# Altium PCB PCB2.PcbDoc
Units mm, origin at the board's own origin, x right, y up, seen from the top; angles counter-clockwise.
Board outline 27 x 48 mm, 2 copper layers (Top Layer 1, Bottom Layer 1), stack 0.532 mm thick; 25 components, 19 nets, 96 pads, 17 vias.
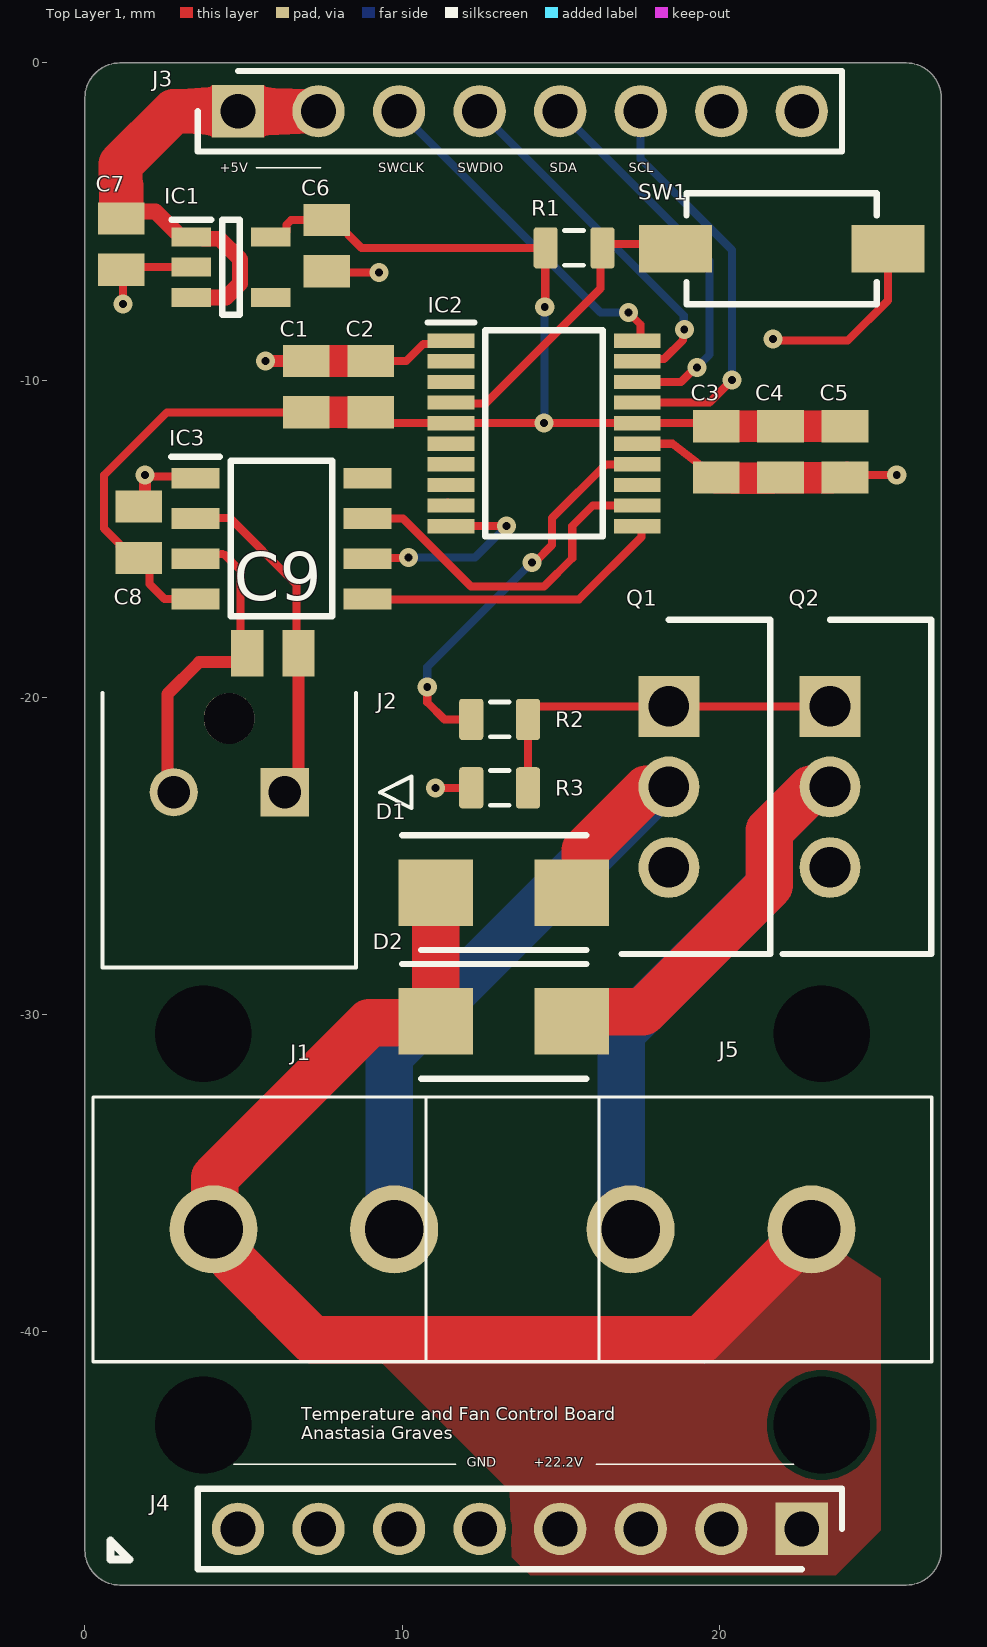
[diagram p0: Top Layer 1 view]
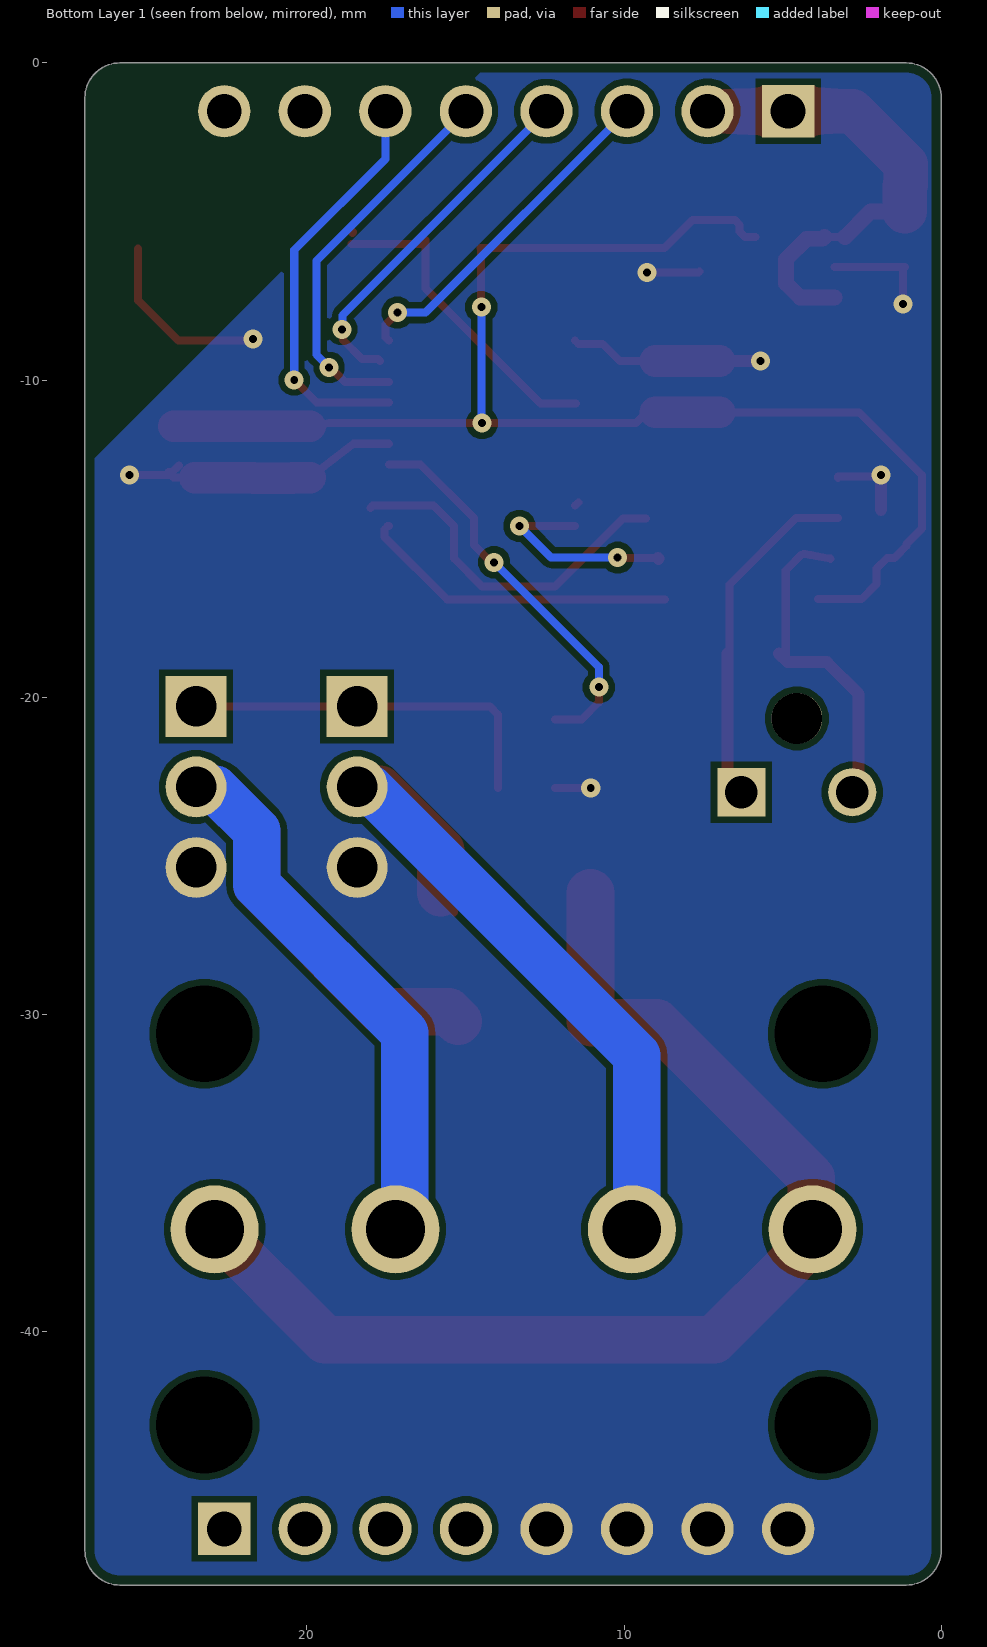
[diagram p1: Bottom Layer 1 view, seen from below]
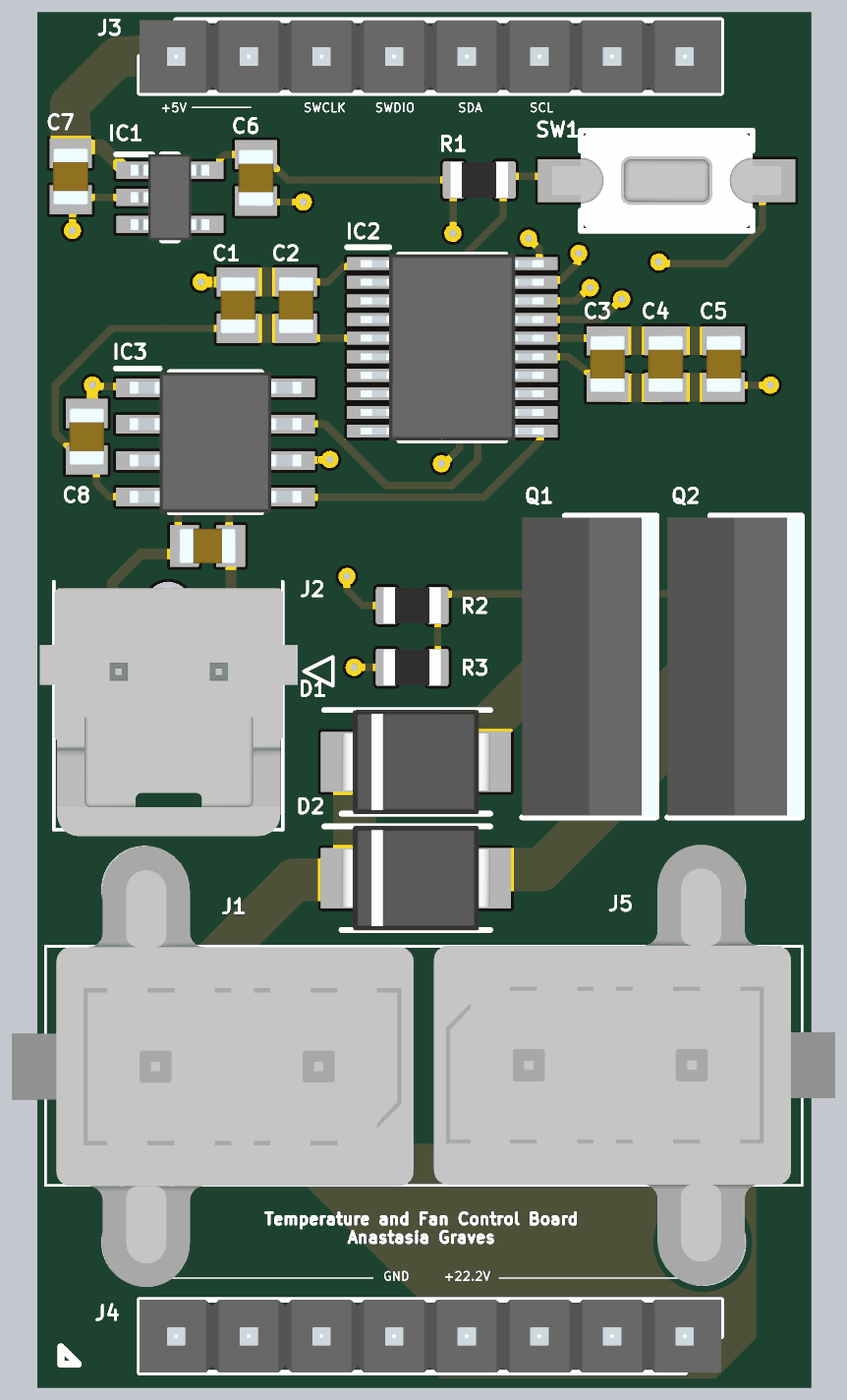
[diagram p2: 3D render of the assembled board from above, using the file's embedded part models]

## Layer stack, top to bottom
Top Solder: solder mask 0.0102, Solder Resist, Dk 3.5
Top Layer 1: signal copper 0.035
Dielectric 2: prepreg 0.0711, PP-006, Dk 4.1
Dielectric 1: dielectric 0.32, FR-4, Dk 4.8
Dielectric 3: prepreg 0.0711, PP-006, Dk 4.1
Bottom Layer 1: signal copper 0.035
Bottom Solder: solder mask 0.0102, Solder Resist, Dk 3.5

## Board outline
1.1,-48 cw(c1.1,-46.9) 0,-46.9 0,-1.1 cw(c1.1,-1.1) 1.1,0 25.9,0 cw(c25.9,-1.1) 27,-1.1 27,-46.9 cw(c25.9,-46.9) 25.9,-48

## Design rules (kind name [scope] priority, off if disabled: settings)
BoardOutlineClearance [All] p1: gap=0.3 ignorepadtopadclearanceinfootprint=FALSE except(0.4: Arc-SplitBarrior Arc-SplitContinuation Track-SplitBarrior Track-SplitContinuation SMDPad-SplitBarrior SMDPad-SplitContinuation THPad-SplitBarrior THPad-SplitContinuation Via-SplitBarrior Via-SplitContinuation Fill-SplitBarrior Fill-SplitContinuation Poly-SplitBarrior Poly-SplitContinuation Region-SplitBarrior Region-SplitContinuation Text-SplitBarrior Text-SplitContinuation)
Clearance "Clearance Different Nets" [All] p1: gap=0.2 ignorepadtopadclearanceinfootprint=FALSE except(0.089: Arc-Arc Arc-Track Arc-SMDPad Track-Track Track-SMDPad; 0.127: SMDPad-SMDPad SMDPad-Via THPad-Via Via-Via; 0.254: Arc-Via Arc-Text Track-Via Track-Text SMDPad-Text THPad-Text Via-Text Fill-Text Poly-Text Region-Text Text-Text; 0.5: THPad-THPad Via-Hole)
Clearance "Clearance Same Nets" [All] p2: gap=0.2 ignorepadtopadclearanceinfootprint=FALSE except(0.089: Arc-Arc Arc-Track Arc-SMDPad Track-Track Track-SMDPad SMDPad-SMDPad; 0.127: SMDPad-Via THPad-Via; 0.254: Arc-Via Arc-Text Track-Via Track-Text SMDPad-Text THPad-Text Via-Via Via-Text Fill-Text Poly-Text Region-Text Text-Text)
Clearance "Clearance Bottom Layer" [OnLayer('Bottom Layer')] p3: gap=0.203 ignorepadtopadclearanceinfootprint=TRUE except(0.254: Arc-Text Track-Text SMDPad-Text THPad-Text Via-Text Fill-Text Poly-Text Region-Text Text-Text)
Clearance "Clearance Top Layer" [OnLayer('Top Layer')] p4: gap=0.203 ignorepadtopadclearanceinfootprint=TRUE except(0.254: Arc-Text Track-Text SMDPad-Text THPad-Text Via-Text Fill-Text Poly-Text Region-Text Text-Text)
HoleSize [All] p1: absolutevalues=TRUE maxlimit=6.3 minlimit=0.2 maxpercent=80.000 minpercent=20.000
MinimumAnnularRing [All] p1: minimumring=0.13
MinimumSolderMaskSliver [All] p1: minsoldermaskwidth=0.1
PolygonConnect PolygonConnect_1 [All] p1: connectstyle=Direct reliefconductorwidth=0.508 reliefentries=4 polygonreliefangle="90 Angle" airgapwidth=0.254
RoutingCorners [All] p1: cornerstyle=Round minsetback=2.54 maxsetback=2.54
RoutingVias [All] p1: holewidth=0.5 width=1 viastyle="Through Hole" minholewidth=0.2 minwidth=0.35 maxholewidth=1 maxwidth=2
SilkToSilkClearance [All] p1: silktosilkclearance=0.1
SilkToSolderMaskClearance [IsPad] p1: minsilkscreentomaskgap=0.1 clearancetoexposedcopper=TRUE
SolderMaskExpansion [All] p1: expansion=0.102 istentingtop=FALSE
SupplyNets "Schematic Supply Nets_8" [InNet('+22.2')] p1: voltage=0.000
SupplyNets "Schematic Supply Nets_7" [InNet('VDD')] p2: voltage=0.000
SupplyNets "Schematic Supply Nets_6" [InNet('VSS')] p3: voltage=0.000
SupplyNets "Schematic Supply Nets_3" [InNet('+5')] p4: voltage=0.000
Width [All] p1: maxlimit=2.54 minlimit=0.089 preferedwidth=0.381
25 further rules are at their usual default settings.

## Components (designator, comment, footprint, x,y, rotation, side; value= is the part's Value field where it differs from the comment)
C1 "1uF" CAPC2012X94N#1 6.985,-10.208 r270 top
C2 "10nF" CAPC2012X94N#1 9.017,-10.208 r270 top
C3 "4.7uf" CAPC2012X94N#1 19.904,-12.263 r90 top
C4 "100nF" CAPC2012X94N#1 21.936,-12.263 r90 top
C5 "100nF" CAPC2012X94N#1 23.968,-12.263 r90 top
C6 "1uF" CAPC2012X94N#1 7.62,-5.763 r90 top
C7 "1uF" CAPC2012X94N#1 1.143,-5.715 r90 top
C8 "0.1uF" CAPC2012X94N#2 1.7,-14.8 r270 top
C9 "0.01uF" CAPC2012X94N#1 5.925,-18.62 r0 top
D1 "SD560BTR" DIOM5236X260N 13.208,-26.162 r0 top
D2 "SD560BTR" DIOM5236X260N 13.208,-30.226 r0 top
IC1 "NCP164CSN330T1G" SOT95P275X110-5N 4.607,-6.442 r0 top
IC2 "STM32F030F4P6TR" SOP65P640X120-20N 14.478,-11.684 r0 top
IC3 "MAX31855KASA+" SOIC127P600X175-8N 6.2,-15 r0 top
J1 "172065-0002" 1720650002 9.754,-36.783 r90 top
J2 "172286-1302" 172286-YY02 6.3,-23 r180 top
J3 "61300811121" HDRV8W64P0X254_1X8_2032X254X854P 4.826,-1.524 r0 top
J4 "61300811121" HDRV8W64P0X254_1X8_2032X254X854P 22.606,-46.228 r180 top
J5 "172065-0002" 1720650002 17.209,-36.783 r270 top
Q1 "IRLZ44NPBF" TO254P469X1042X1967-3P 18.415,-20.29 r270 top
Q2 "IRLZ44NPBF" TO254P469X1042X1967-3P 23.495,-20.29 r270 top
R1 "Resistor 4R7  +/-5 % 0805 125 mW" RESC0805(2012)_L 15.42,-5.833 r180 top value=40k
R2 "Resistor 4R7  +/-5 % 0805 125 mW" RESC0805(2012)_L 13.081,-20.701 r0 top value=220
R3 "Resistor 4R7  +/-5 % 0805 125 mW" RESC0805(2012)_L 13.081,-22.86 r0 top value=40k
SW1 "434111050826" 434111050826 21.971,-5.859 r0 top

## Footprints (in the part's own frame and the unit in brackets; to place one, negate y for a bottom-side part, rotate by r counter-clockwise, add the part's x,y. Pads: shape width x height; smd on the part's side, far side on the other; paste and mask are expansions set on the pad)
172286-YY02 [mm]
  rect 1.52x1.52 hole 1.02: 1(0,0)
  round 1.52 hole 1.02: 2(3.5,0)
  round 1.6 hole 1.6 unplated: 3(1.75,-2.33)
  silkscreen extent -4,-3.13 5.75,5.53, body extent -2.77,-2.91 6.23,5.75, height 13.85
1720650002 [mm]
  round 2.775 hole 1.85: 1(0,0) 2(0,5.7)
  round 1.525 hole 3.05 unplated: 3(-6.17,6.025) 4(6.17,6.025)
  silkscreen extent -4.18,-6.46 4.18,9.5, body extent -7.73,-3.37 7.67,10.66, height 14.73
434111050826 [mm] "SMD Tact Switch, body 6x3.5mm"
  rect 2.3x1.5 smd: 1(-3.35,0) 2(3.35,0)
  silkscreen extent -3,-1.75 3,1.75, body extent -4,-1.75 4,1.75, height 5
CAPC2012X94N#1 [mm]
  rect 1.02x1.47 smd: 1(-0.81,0) 2(0.81,0)
  body extent -1,-0.63 1,0.63, height 0.94
CAPC2012X94N#2 [mm]
  rect 1.02x1.47 smd: 1(-0.81,0) (0.81,0)
  body extent -1,-0.63 1,0.63, height 0.94
DIOM5236X260N [mm]
  rect 2.35x2.1 smd: 1(-2.15,0) 2(2.15,0)
  silkscreen extent -3.2,-1.81 2.6,1.81, body extent -2.6,-1.83 2.6,1.83, height 2.4
HDRV8W64P0X254_1X8_2032X254X854P [mm]
  rect 1.65x1.65 hole 1.1: 1(0,0)
  round 1.65 hole 1.1: 2(2.54,0) 3(5.08,0) 4(7.62,0) 5(10.16,0) 6(12.7,0) 7(15.24,0) 8(17.78,0)
  silkscreen extent -1.27,-1.27 19.05,1.27, body extent -1.27,-1.27 19.05,1.27, height 8.54
RESC0805(2012)_L [mm] "Chip Resistor, Body 2.0x1.3mm, IPC High Density"
  rrect25% 0.76x1.3 smd: 1(-0.9,0) 2(0.89,0)
  silkscreen extent -0.3,-0.55 0.3,0.55, body extent -1,-0.62 1,0.63, height 0.6
SOIC127P600X175-8N [mm]
  rect 1.525x0.65 smd: 1(-2.712,1.905) 2(-2.712,0.635) 3(-2.712,-0.635) 4(-2.712,-1.905) 5(2.712,-1.905) 6(2.712,-0.635) 7(2.712,0.635) 8(2.712,1.905)
  silkscreen extent -3.47,-2.45 1.6,2.58, body extent -3,-2.45 3,2.45, height 1.75
SOP65P640X120-20N [mm]
  rect 1.475x0.45 smd: 1(-2.938,2.925) 2(-2.938,2.275) 3(-2.938,1.625) 4(-2.938,0.975) 5(-2.938,0.325) 6(-2.938,-0.325) 7(-2.938,-0.975) 8(-2.938,-1.625) 9(-2.938,-2.275) 10(-2.938,-2.925) 11(2.938,-2.925) 12(2.938,-2.275) 13(2.938,-1.625) 14(2.938,-0.975) 15(2.938,-0.325) 16(2.938,0.325) 17(2.938,0.975) 18(2.938,1.625) 19(2.938,2.275) 20(2.938,2.925)
  silkscreen extent -3.67,-3.25 1.85,3.5, body extent -3.2,-3.25 3.2,3.25, height 1.2
SOT95P275X110-5N [mm]
  rect 1.25x0.6 smd: 1(-1.25,0.95) 2(-1.25,0) 3(-1.25,-0.95) 4(1.25,-0.95) 5(1.25,0.95)
  silkscreen extent -1.88,-1.5 0.28,1.5, body extent -1.38,-1.5 1.38,1.5, height 1.1
TO254P469X1042X1967-3P [mm]
  rect 1.92x1.92 hole 1.28: 1(0,0)
  round 1.92 hole 1.28: 2(2.54,0) 3(5.08,0)
  silkscreen extent -2.73,-1.5 7.81,3.19, body extent -2.67,-1.5 7.75,3.19, height 18.84

## Part data
C1 C2 C3 C4 C5 C6 C7 C8 C9: library part 08055C104K4T2A, "Capacitor", Manufacturer_Name="Kyocera AVX", Mouser Part Number=581-08055C104K4, Arrow Part Number=08055C104K4T2A, Arrow Price/Stock=https://www.arrow.com/en/products/08055c104k4t2a/avx, Datasheet Link=https://componentsearchengine.com/Datasheets/2/08055C104K4T2A.pdf, Height=0.94mm, Manufacturer_Part_Number=08055C104K4T2A, Mouser Price/Stock=https://www.mouser.co.uk/ProductDetail/KYOCERA-AVX/08055C104K4T2A?qs=xMTsDkQFXIwOG0s%252Bx1urSg%3D%3D
D1 D2: "Diode", Manufacturer_Name="SMC Diode Solutions", Datasheet Link=http://www.smc-diodes.com/propdf/SD560B%20N1412%20REV.D.pdf, Height=2.6mm, Manufacturer_Part_Number=SD560BTR
IC1: "Integrated Circuit", Manufacturer_Name=onsemi, Mouser Part Number=863-NCP164CSN330T1G, Arrow Part Number=NCP164CSN330T1G, Arrow Price/Stock=https://www.arrow.com/en/products/ncp164csn330t1g/on-semiconductor?utm_currency=USD&region=nac, Datasheet Link=https://componentsearchengine.com/Datasheets/2/NCP164CSN330T1G.pdf, Height=1.1mm, Manufacturer_Part_Number=NCP164CSN330T1G, Mouser Price/Stock=https://www.mouser.co.uk/ProductDetail/onsemi/NCP164CSN330T1G?qs=xZ%2FP%252Ba9zWqbi%2FAyy5UtoRw%3D%3D
IC2: "Integrated Circuit", Manufacturer_Name=STMicroelectronics, Mouser Part Number=511-STM32F030F4P6TR, Arrow Part Number=STM32F030F4P6TR, Arrow Price/Stock=https://www.arrow.com/en/products/stm32f030f4p6tr/stmicroelectronics?utm_currency=USD&region=nac, Datasheet Link=https://www.st.com/resource/en/datasheet/stm32f030rc.pdf, Height=1.2mm, Manufacturer_Part_Number=STM32F030F4P6TR, Mouser Price/Stock=https://www.mouser.co.uk/ProductDetail/STMicroelectronics/STM32F030F4P6TR?qs=MavH1QghrkE4yfyLOfvVsw%3D%3D
IC3: "Integrated Circuit", Manufacturer_Name="Analog Devices", Mouser Part Number=700-MAX31855KASA+, Arrow Part Number=MAX31855KASA+, Arrow Price/Stock=https://www.arrow.com/en/products/max31855kasa/analog-devices?utm_currency=USD&region=nac, Datasheet Link=https://datasheets.maximintegrated.com/en/ds/MAX31855.pdf, Height=1.75mm, Manufacturer_Part_Number=MAX31855KASA+, Mouser Price/Stock=https://www.mouser.co.uk/ProductDetail/Analog-Devices-Maxim-Integrated/MAX31855KASA%2b?qs=ffX8NcjNb2QF5YDuL5Qj5g%3D%3D
J1 J5: "Connector", Manufacturer_Name=Molex, Mouser Part Number=538-172065-0002, Datasheet Link=https://www.molex.com/pdm_docs/sd/1720650002_sd.pdf, Height=14.8mm, Manufacturer_Part_Number=172065-0002, Mouser Price/Stock=https://www.mouser.co.uk/ProductDetail/Molex/172065-0002?qs=MxnWX8BLHKc63YRsWKsBxw%3D%3D
J2: "Connector", Manufacturer_Name=Molex, Mouser Part Number=538-172286-1302, Datasheet Link=https://www.molex.com/pdm_docs/sd/1722861102_sd.pdf, Height=14mm, Manufacturer_Part_Number=172286-1302, Mouser Price/Stock=https://www.mouser.co.uk/ProductDetail/Molex/172286-1302?qs=M4iqfhoVaNrqWbEQuvhqgw%3D%3D
J3 J4: "Connector", Manufacturer_Name="Wurth Elektronik", Mouser Part Number=710-61300811121, Datasheet Link=http://katalog.we-online.de/em/datasheet/6130xx11121.pdf, Height=8.54mm, Manufacturer_Part_Number=61300811121, Mouser Price/Stock=https://www.mouser.co.uk/ProductDetail/Wurth-Elektronik/61300811121?qs=PhR8RmCirEZRdx%252BVlEmRRA%3D%3D
Q1 Q2: "MOSFET (N-Channel)", Manufacturer_Name=Infineon, Mouser Part Number=942-IRLZ44NPBF, Arrow Part Number=IRLZ44NPBF, Arrow Price/Stock=https://www.arrow.com/en/products/irlz44npbf/infineon-technologies-ag?utm_currency=USD&region=europe, Datasheet Link=http://www.irf.com/product-info/datasheets/data/irlz44n.pdf, Height=4.69mm, Manufacturer_Part_Number=IRLZ44NPBF, Mouser Price/Stock=https://www.mouser.co.uk/ProductDetail/Infineon-Technologies/IRLZ44NPBF?qs=9%252BKlkBgLFf15OZZk%252BD0ibg%3D%3D
R1 R2 R3: library part CMP-009-00174-3, "Chip Resistor, 4,7 Ohms, +/-5 %, 125 mW, -55 to 155 degC, 0805", Case/Package=0805, Max Operating Temperature=155°C, Min Operating Temperature=-55°C, Power=125mW, Tolerance=5%, Pins=2
SW1: library part CMP-011-00014-1, "Keypad Switch, 1 Switches, SPST, Momentary-tactile, 0.05A, 12VDC, 3.24N, Solder Terminal, Surface Mount-straight", Max Operating Temperature=85°C, Min Operating Temperature=-40°C, Mounting Technology="Surface Mount", RoHS Compliant=Yes

## Via types
v1: diameter 0.6, hole 0.25, Top Layer 1 to Bottom Layer 1, 17 vias

## Nets (pads, with @x,y where several pads share a name; then routed paths per layer and width w, separated by ;. In a path a pad name is that pad's centre, name@x,y a point inside that pad or via, vN(x,y) a via of type N, cw(c..) or ccw(c..) an arc to the next point about the centre after c; other vN are vias at no path point)
+5: C7.2 IC1.1 IC1.3 J3.1 J3.2 | length 15.3
  Top Layer 1 w0.254: 1.121,-3.848 1.143,-3.87 ; IC1.1@3.032,-5.492 IC1.1 IC1.1@3.682,-5.492
  Top Layer 1 w0.5: C7.2@1.143,-4.682 2.222,-4.682 IC1.1@3.032,-5.492 ; IC1.3 4.453,-7.392 4.893,-6.952 4.893,-6.193 4.242,-5.542 3.732,-5.542 IC1.1@3.682,-5.492
  Top Layer 1 w1.4: 1.121,-3.848 1.121,-3.197 2.794,-1.524 J3.1 J3.2 ; C7.2@1.143,-4.682 1.143,-3.87
+22.2: D1.1 D2.1 J1.2 J4.1 J4.2 J4.3 J4.4 J5.2 | length 36.5
  Top Layer 1 w0.254: D2.1@10.933,-30.226 D2.1
  Top Layer 1 w1: D2.1@11.01,-30.274 D2.1
  Top Layer 1 w1.5: J1.2 4.054,-37.128 4.691,-37.766 4.691,-37.791 7.159,-40.259 19.433,-40.259 J5.2 ; J1.2@4.094,-36.543 4.094,-35.149 8.969,-30.274 D2.1@11.01,-30.274 ; D2.1 D1.1
MISO: IC2.12 IC3.7 | length 11.3
  Top Layer 1 w0.254: IC3.7@9.312,-14.365 10.028,-14.365 12.173,-16.51 14.478,-16.51 15.367,-15.621 15.367,-14.605 16.013,-13.959 17.929,-13.959 IC2.12@17.998,-14.028
MOSI: IC2.13
NCS: IC2.10 IC3.6 | length 6.6
  Top Layer 1 w0.254: IC3.6@8.93,-15.617 v1@10.182,-15.617 ; IC2.10 11.545,-14.604 13.295,-14.604 v1(13.3,-14.6)
  Top Layer 1 w0.381: IC3.6 IC3.6@8.93,-15.617 ; v1@10.182,-15.617 v1(10.2,-15.6)
  Bottom Layer 1 w0.254: v1(10.2,-15.6) 12.3,-15.6 v1(13.3,-14.6)
NetC9_1: C9.1 IC3.3 J2.2 | length 10.7
  Top Layer 1 w0.254: IC3.3 4.123,-15.515 4.286,-15.485 4.338,-15.485 4.422,-15.522 4.85,-15.95 4.9,-16 C9.1@4.9,-18.8
  Top Layer 1 w0.381: J2.2 2.602,-22.802 2.602,-19.898 3.602,-18.898 4.838,-18.898 C9.1
NetC9_2: C9.2 IC3.2 J2.1 | length 11
  Top Layer 1 w0.254: IC3.2@3.257,-14.351 4.572,-14.351 6.675,-16.454 C9.2@6.675,-18.62
  Top Layer 1 w0.381: J2.1 6.735,-22.565 C9.2
NetD1_2: D1.2 J1.1 Q1.2 | length 23.9
  Top Layer 1 w0.254: D1.2 15.358,-26.783 D1.2@15.975,-26.166
  Top Layer 1 w1.5: D1.2@15.783,-26.166 15.783,-24.829 17.702,-22.91 18.335,-22.91 Q1.2
  Bottom Layer 1 w1.5: J1.1@9.6,-36.629 9.6,-31.3 17.99,-22.91 18.335,-22.91 Q1.2
NetD2_2: D2.2 J5.1 Q2.2 | length 29.4
  Top Layer 1 w1.5: D2.2@15.231,-30.226 15.531,-29.926 17.593,-29.926 21.585,-25.934 21.585,-24.215 22.89,-22.91 23.415,-22.91 Q2.2
  Bottom Layer 1 w1.5: J5.1@16.909,-36.883 16.909,-30.591 21.585,-25.915 21.585,-24.215 22.89,-22.91 23.415,-22.91 Q2.2
NetIC2_4: IC2.4 R1.1 SW1.1 | length 10.1
  Top Layer 1 w0.254: IC2.4@11.511,-10.738 12.63,-10.738 ; 12.629,-10.739 12.63,-10.738 ; R1.1@16.256,-5.588 16.256,-7.112 12.63,-10.738 ; R1.1@16.32,-5.706 SW1.1@18.595,-5.706 ; SW1.1@18.542,-5.334 SW1.1@18.568,-5.36
NetIC2_14: IC2.14 R2.1 | length 12.5
  Top Layer 1 w0.254: v1(10.795,-19.685) 10.795,-20.163 11.333,-20.701 R2.1 ; v1(14.097,-15.748) 14.191,-15.748 14.732,-15.207 14.732,-14.351 16.424,-12.659 IC2.14
  Bottom Layer 1 w0.254: v1(10.795,-19.685) 10.795,-19.05 v1(14.097,-15.748)
PWM: Q1.1 Q2.1 R2.2 R3.2 | length 12.6
  Top Layer 1 w0.254: R3.2 13.971,-20.553 14.224,-20.3 17.725,-20.3 18.415,-20.99 Q1.1@18.705,-20.7 ; Q1.1 Q2.1
SCK: IC2.11 IC3.5 | length 10.1
  Top Layer 1 w0.254: IC3.5@8.705,-16.915 15.585,-16.915 17.551,-14.949 17.551,-14.707 17.453,-14.609 IC2.11
SCL: IC2.17 J3.6 | length 12.9
  Top Layer 1 w0.254: IC2.17 19.691,-10.709 v1(20.4,-10)
  Bottom Layer 1 w0.254: J3.6 17.526,-3.026 20.4,-5.9 v1(20.4,-10)
SDA: IC2.18 J3.5 | length 12.3
  Top Layer 1 w0.254: IC2.18 18.796,-10.059 19.255,-9.6 v1(19.3,-9.6)
  Bottom Layer 1 w0.254: J3.5 19.7,-6.238 19.7,-9.2 v1(19.3,-9.6)
SWCLK: IC2.20 J3.3 | length 11
  Top Layer 1 w0.254: v1(17.145,-7.874) 17.526,-8.255 17.526,-8.661 17.514,-8.661 IC2.20
  Bottom Layer 1 w0.254: J3.3 16.256,-7.874 v1(17.145,-7.874)
SWDIO: IC2.19 J3.4 | length 11.3
  Top Layer 1 w0.254: IC2.19@17.694,-9.398 17.758,-9.334 18.266,-9.334 18.857,-8.743 18.857,-8.443 v1(18.9,-8.4)
  Bottom Layer 1 w0.254: J3.4 18.883,-7.961 18.883,-8.383 v1(18.9,-8.4)
VDD: C1.2 C2.2 C3.2 C4.2 C5.2 C6.2 C8. IC1.5 IC2.5 IC2.16 IC3.4 R1.2 | length 45.6
  Top Layer 1 w0.254: IC3.4@3.888,-16.905 2.505,-16.905 2.035,-16.435 2.035,-15.945 C8. 1.475,-15.61 1.092,-15.227 1.092,-15.175 0.6,-14.683 0.6,-13 2.582,-11.018 C1.2 ; IC1.5 6.182,-5.492 6.355,-5.319 6.355,-5.102 6.504,-4.953 C6.2 7.845,-4.953 8.725,-5.833 R1.2 14.515,-5.848 14.515,-7.685 v1(14.5,-7.7) ; C2.2@9.242,-10.843 9.242,-10.976 9.625,-11.359 IC2.5 v1(14.478,-11.359) IC2.16 19.296,-11.359 C3.2
  Top Layer 1 w1: C1.2 C2.2 ; C3.2 C4.2 C5.2 C5.2@24.201,-11.453
  Bottom Layer 1 w0.254: v1@14.489,-11.348 v1@14.489,-7.711
VSS: C1.1 C2.1 C3.1 C4.1 C5.1 C6.1 C7.1 C8.1 IC1.2 IC2.1 IC2.15 IC3.1 J4.5 J4.6 J4.7 J4.8 Q1.3 Q2.3 R3.1 SW1.2 | length 29.6
  Top Layer 1 w0.254: v1(1.2,-7.6) 1.2,-6.499 1.143,-6.442 IC1.2 ; v1(1.9,-13) 1.947,-13.047 3.252,-13.047 3.257,-13.052 IC3.1@3.257,-13.081 ; C6.1 7.651,-6.604 v1(9.271,-6.604) ; C2.1 10.133,-9.398 10.674,-8.857 11.442,-8.857 IC2.1 ; v1(11.049,-22.86) R3.1 ; IC2.15 18.027,-12.009 18.525,-12.009 19.411,-12.69 C3.1@19.903,-13.069 ; C3.1@19.583,-12.826 C3.1 ; v1(21.7,-8.7) 21.754,-8.754 24.056,-8.754 25.321,-7.489 SW1.2 ; C5.1 24.203,-13.073 24.37,-12.906 24.254,-12.906 C5.1@24.038,-12.69 ; C5.1@24.37,-13 v1(25.6,-13)
  Top Layer 1 w0.381: C8.1@1.9,-14.09 v1(1.9,-13) ; v1(5.7,-9.4) 5.701,-9.399 6.984,-9.399 C1.1
  Top Layer 1 w1: C1.1 C2.1 ; C3.1@19.904,-13.083 20.452,-13.083 20.469,-13.1 21.684,-13.1 21.701,-13.083 21.936,-13.083 21.939,-13.08 C5.1@23.531,-13.08
pads on no net: IC1.4 IC2.2 IC2.3 IC2.6 IC2.7 IC2.8 IC2.9 IC3.8 J1.3 J1.4 J2.3 J3.7 J3.8 J5.3 J5.4
copper on no net: | length 0.1
  Top Layer 1 w0.254: 11.442,-13.861 11.54,-13.959

## Polygon pours and split planes (outlines as drawn)
+22.2 on Top Layer 1 "+22.2_L01_P001" (solid, pour order 1): 22.86,-36.83 19.431,-40.259 14.351,-40.259 13.589,-40.259 8.636,-40.259 13.398,-45.022 13.462,-47.117 14.097,-47.752 23.622,-47.752 25.1,-46.274 25.1,-38.323
VSS on Bottom Layer 1 "VSS_L02_P000" (solid, remove dead copper, pour order 0): 0,-48.006 27.035,-48.006 27,-37.973 27,-12.776 14.224,0 -0.127,0

## Silkscreen, mask and mechanical layers (free items; w line width, h text height)
Top Overlay:
  lines w0.05: 4.699,-44.196 11.7,-44.196 ; 5.4,-3.3 7.432,-3.3 ; 16.129,-44.196 22.352,-44.196
  lines w0.254: 0.8,-47.2 1.4,-47.2 0.8,-46.6 0.8,-47.2
  text "+5V" at 4.25,-3.45 h0.3
  text "SWCLK" at 9.25,-3.45 h0.3
  text "SWDIO" at 11.75,-3.45 h0.3
  text "SDA" at 14.65,-3.45 h0.3
  text "SCL" at 17.15,-3.45 h0.3
  text "Temperature and Fan Control Board / Anastasia Graves" at 6.824,-43.4 h0.4
  text "GND" at 12.034,-44.273 h0.3
  text "+22.2V" at 14.147,-44.273 h0.3
Mechanical 1:
  lines w0.254: 0,-46.9 ccw(c1.1,-46.9) 1.1,-48 2,-48 25.9,-48 ccw(c25.9,-46.9) 27,-46.9 27,-1.1 ccw(c25.9,-1.1) 25.9,0 1.1,0 ccw(c1.1,-1.1) 0,-1.1 0,-46.9